# Altium PCB P2_tester.PcbDoc
Units mil, origin at the board's own origin, x right, y up, seen from the top; angles counter-clockwise.
Board outline 1210 x 3700 mil, 2 copper layers (Top Layer, Bottom Layer); 19 components, 40 nets, 201 pads, 0 vias.
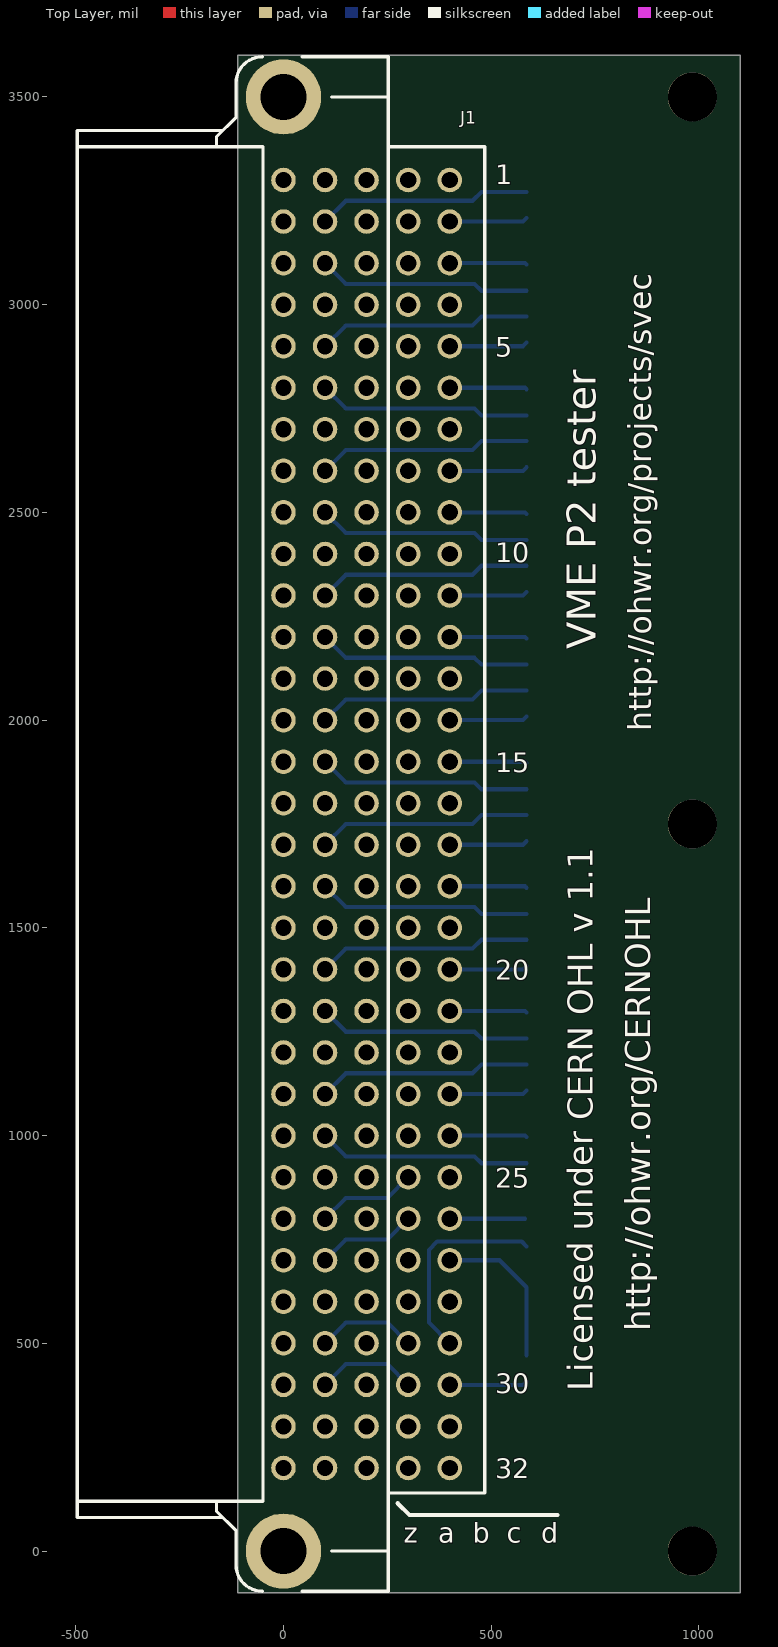
[diagram p0: Top Layer view]
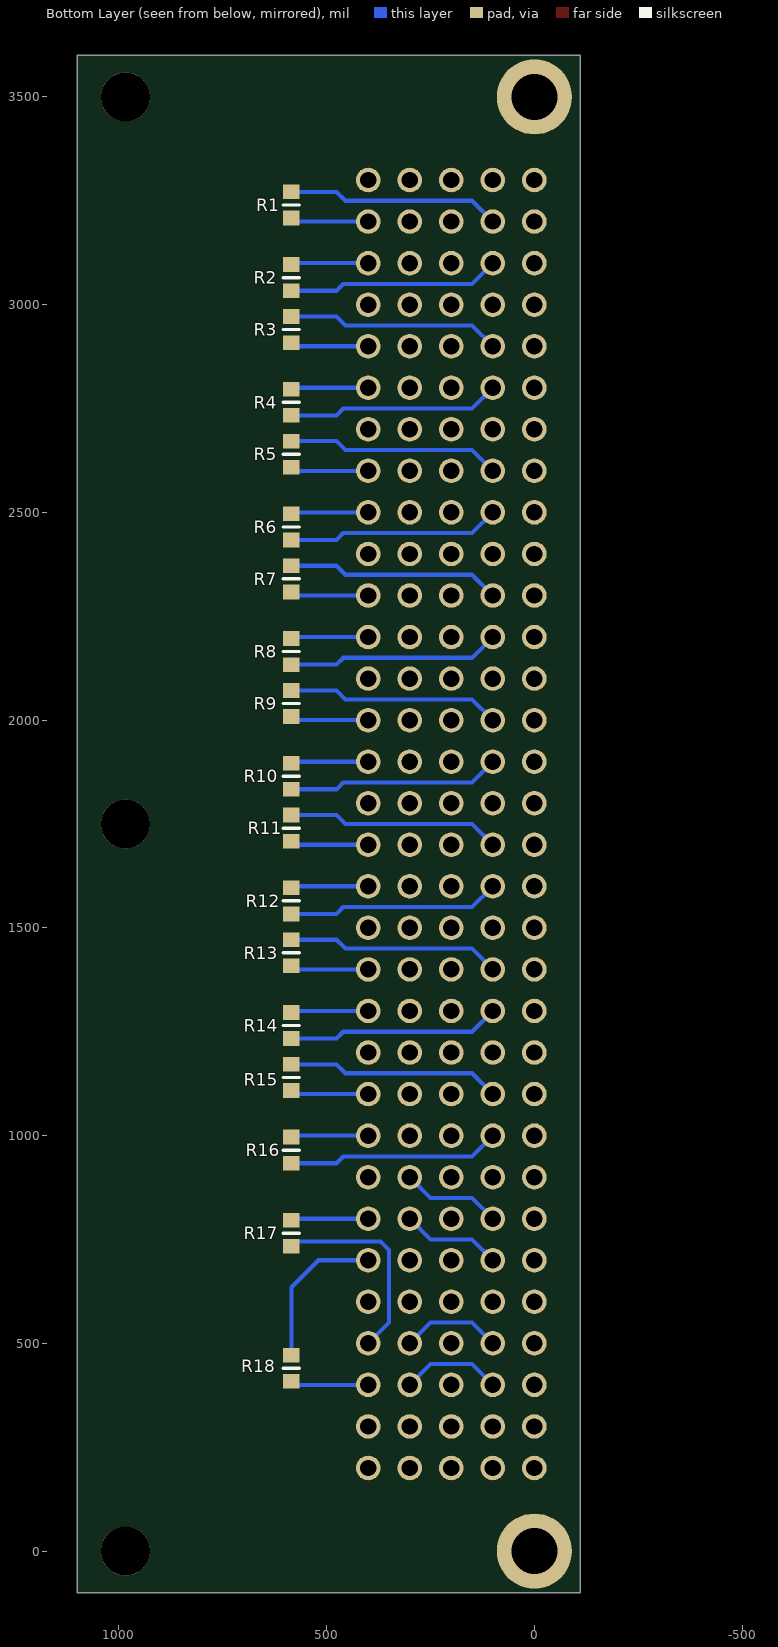
[diagram p1: Bottom Layer view, seen from below]
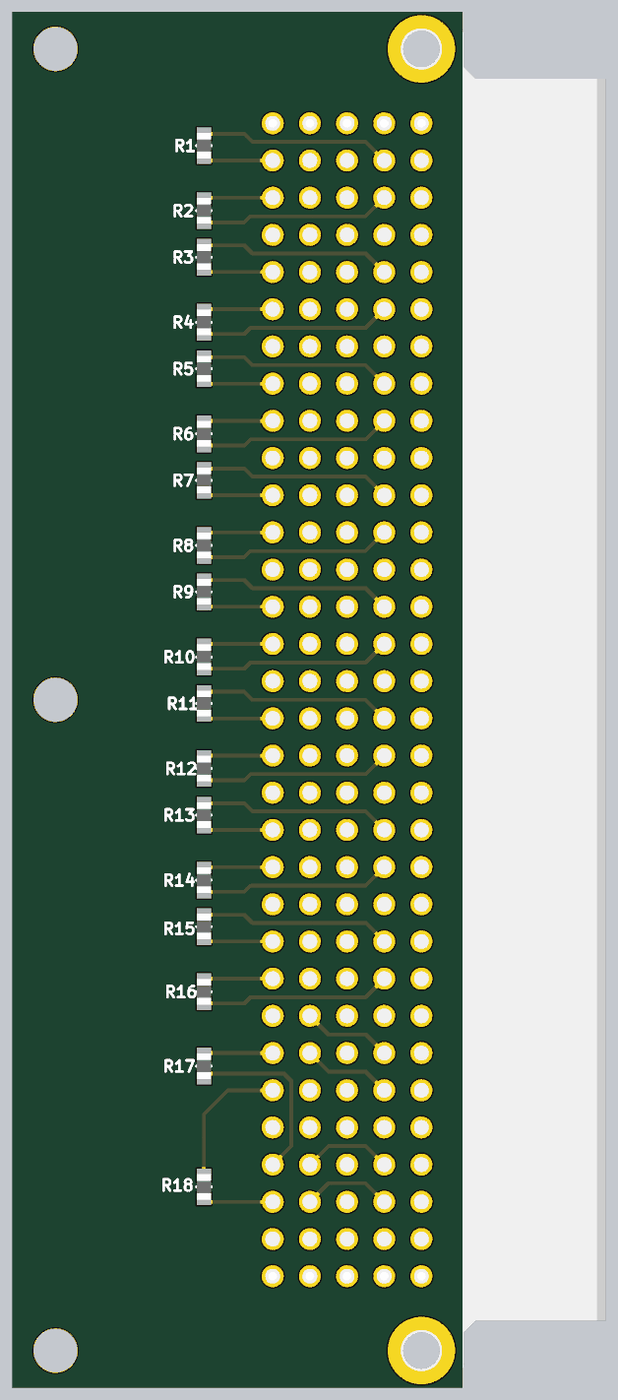
[diagram p2: 3D render of the assembled board from below, using the file's embedded part models]

## Layer stack, top to bottom
Top Layer: signal copper 1.4
Dielectric: dielectric 12.6, FR-4, Dk 4.8
Bottom Layer: signal copper 1.4

## Board outline
-110,-100 1100,-100 1100,3600 -110,3600

## Design rules (kind name [scope] priority, off if disabled: settings)
Clearance [All] p1: gap=5
DiffPairsRouting [All] p1: maxlimit=10 minlimit=6 mostfreqgap=6 maxuncoupledlength=500
HoleSize [All] p1: absolutevalues=TRUE maxlimit=1000 minlimit=1 maxpercent=80.000 minpercent=20.000
PolygonConnect [All] p1: connectstyle=Relief reliefconductorwidth=10 reliefentries=4 polygonreliefangle="90 Angle"
RoomDefinition P2_tester [InComponentClass('P2_tester')] p1: confinementstyle=ConfineIn formatcopy=TRUE lockcomponents=FALSE outline -780,-385 1490,-385 1490,3860 -780,3860
RoutingVias [All] p1: holewidth=28 width=50 viastyle="Through Hole" minholewidth=28 minwidth=50 maxholewidth=28 maxwidth=50
SilkToSilkClearance [All] p1: silktosilkclearance=0
SilkscreenOverComponentPads [All] p1: minsilkscreentomaskgap=5
SolderMaskExpansion [All] p1: expansion=4
Width [All] p1: maxlimit=10 minlimit=6 preferedwidth=10 minimp=50.000000 maximp=50.000000 favimp=50.000000
24 further rules are at their usual default settings.

## Components (designator, comment, footprint, x,y, rotation, side; value= is the part's Value field where it differs from the comment)
J1 "HAR-BUS 64" "HARTING_02 04 160 1101" 0,200 r180 top locked
R1 "100" RESC1608X55N 585,3240 r270 bottom
R2 "100" RESC1608X55N 585,3065 r90 bottom
R3 "100" RESC1608X55N 585,2940 r270 bottom
R4 "100" RESC1608X55N 585,2765 r90 bottom
R5 "100" RESC1608X55N 585,2640 r270 bottom
R6 "100" RESC1608X55N 585,2465 r90 bottom
R7 "100" RESC1608X55N 585,2340 r270 bottom
R8 "100" RESC1608X55N 585,2165 r90 bottom
R9 "100" RESC1608X55N 585,2040 r270 bottom
R10 "100" RESC1608X55N 585,1865 r90 bottom
R11 "100" RESC1608X55N 585,1740 r270 bottom
R12 "100" RESC1608X55N 585,1565 r90 bottom
R13 "100" RESC1608X55N 585,1440 r270 bottom
R14 "100" RESC1608X55N 585,1265 r90 bottom
R15 "100" RESC1608X55N 585,1140 r270 bottom
R16 "100" RESC1608X55N 585,965 r90 bottom
R17 "100" RESC1608X55N 585,765 r270 bottom
R18 "100" RESC1608X55N 585,440 r270 bottom

## Footprints (in the part's own frame and the unit in brackets; to place one, negate y for a bottom-side part, rotate by r counter-clockwise, add the part's x,y. Pads: shape width x height; smd on the part's side, far side on the other; paste and mask are expansions set on the pad)
"HARTING_02 04 160 1101" [mm] "PCB connector, DIN 41612, har-bus 64, 160 poles, Angled solder pins, 3.0 mm, Male contacts, Four first mating contacts, Performance level 2 as per IEC 60603-2, Row pitch: 2.54 mm, Without fixing"
  round 1.5 hole 1: a1(-2.54,-78.74) a2(-2.54,-76.2) a3(-2.54,-73.66) a4(-2.54,-71.12) a5(-2.54,-68.58) a6(-2.54,-66.04) a7(-2.54,-63.5) a8(-2.54,-60.96) a9(-2.54,-58.42) a10(-2.54,-55.88) a11(-2.54,-53.34) a12(-2.54,-50.8) a13(-2.54,-48.26) a14(-2.54,-45.72) a15(-2.54,-43.18) a16(-2.54,-40.64) a17(-2.54,-38.1) a18(-2.54,-35.56) a19(-2.54,-33.02) a20(-2.54,-30.48) a21(-2.54,-27.94) a22(-2.54,-25.4) a23(-2.54,-22.86) a24(-2.54,-20.32) a25(-2.54,-17.78) a26(-2.54,-15.24) a27(-2.54,-12.7) a28(-2.54,-10.16) a29(-2.54,-7.62) a30(-2.54,-5.08) a31(-2.54,-2.54) a32(-2.54,0) b1(-5.08,-78.74) b2(-5.08,-76.2) b3(-5.08,-73.66) b4(-5.08,-71.12) b5(-5.08,-68.58) b6(-5.08,-66.04) b7(-5.08,-63.5) b8(-5.08,-60.96) b9(-5.08,-58.42) b10(-5.08,-55.88) b11(-5.08,-53.34) b12(-5.08,-50.8) b13(-5.08,-48.26) b14(-5.08,-45.72) b15(-5.08,-43.18) b16(-5.08,-40.64) b17(-5.08,-38.1) b18(-5.08,-35.56) b19(-5.08,-33.02) b20(-5.08,-30.48) b21(-5.08,-27.94) b22(-5.08,-25.4) b23(-5.08,-22.86) b24(-5.08,-20.32) b25(-5.08,-17.78) b26(-5.08,-15.24) b27(-5.08,-12.7) b28(-5.08,-10.16) b29(-5.08,-7.62) b30(-5.08,-5.08) b31(-5.08,-2.54) b32(-5.08,0) c1(-7.62,-78.74) c2(-7.62,-76.2) c3(-7.62,-73.66) c4(-7.62,-71.12) c5(-7.62,-68.58) c6(-7.62,-66.04) c7(-7.62,-63.5) c8(-7.62,-60.96) c9(-7.62,-58.42) c10(-7.62,-55.88) c11(-7.62,-53.34) c12(-7.62,-50.8) c13(-7.62,-48.26) c14(-7.62,-45.72) c15(-7.62,-43.18) c16(-7.62,-40.64) c17(-7.62,-38.1) c18(-7.62,-35.56) c19(-7.62,-33.02) c20(-7.62,-30.48) c21(-7.62,-27.94) c22(-7.62,-25.4) c23(-7.62,-22.86) c24(-7.62,-20.32) c25(-7.62,-17.78) c26(-7.62,-15.24) c27(-7.62,-12.7) c28(-7.62,-10.16) c29(-7.62,-7.62) c30(-7.62,-5.08) c31(-7.62,-2.54) c32(-7.62,0) d1(-10.16,-78.74) d2(-10.16,-76.2) d3(-10.16,-73.66) d4(-10.16,-71.12) d5(-10.16,-68.58) d6(-10.16,-66.04) d7(-10.16,-63.5) d8(-10.16,-60.96) d9(-10.16,-58.42) d10(-10.16,-55.88) d11(-10.16,-53.34) d12(-10.16,-50.8) d13(-10.16,-48.26) d14(-10.16,-45.72) d15(-10.16,-43.18) d16(-10.16,-40.64) d17(-10.16,-38.1) d18(-10.16,-35.56) d19(-10.16,-33.02) d20(-10.16,-30.48) d21(-10.16,-27.94) d22(-10.16,-25.4) d23(-10.16,-22.86) d24(-10.16,-20.32) d25(-10.16,-17.78) d26(-10.16,-15.24) d27(-10.16,-12.7) d28(-10.16,-10.16) d29(-10.16,-7.62) d30(-10.16,-5.08) d31(-10.16,-2.54) d32(-10.16,0) z1(0,-78.74) z2(0,-76.2) z3(0,-73.66) z4(0,-71.12) z5(0,-68.58) z6(0,-66.04) z7(0,-63.5) z8(0,-60.96) z9(0,-58.42) z10(0,-55.88) z11(0,-53.34) z12(0,-50.8) z13(0,-48.26) z14(0,-45.72) z15(0,-43.18) z16(0,-40.64) z17(0,-38.1) z18(0,-35.56) z19(0,-33.02) z20(0,-30.48) z21(0,-27.94) z22(0,-25.4) z23(0,-22.86) z24(0,-20.32) z25(0,-17.78) z26(0,-15.24) z27(0,-12.7) z28(0,-10.16) z29(0,-7.62) z30(0,-5.08) z31(0,-2.54) z32(0,0)
  round 4.6 hole 2.8: MTG1(0,5.08) MTG2(0,-83.82)
  silkscreen extent -12.3,-86.27 12.6,7.53, body extent -12.3,-86.27 12.6,7.53, height 10.65
RESC1608X55N [mm] "Chip Resistor, EIA 0603, Metric 1608, Body 1.6x0.8mm, IPC Medium Density"
  rect 0.9x1 smd: 1(-0.8,0) 2(0.8,0)
  silkscreen extent 0,-0.5 0,0.5, body extent -0.87,-0.47 0.88,0.48, height 0.55

## Part data
J1: library part "HARTING_02 04 160 1101", "Connector 160zabcd Female (5x32)"
R1 R2 R3 R4 R5 R6 R7 R8 R9 R10 R11 R12 R13 R14 R15 R16 R17 R18: library part R0603_100R_0.1%_0.063W_10PPM, "Resistor - 0.1%"

## Free pads (board coordinates)
  round 118.11 hole 118.11: ""(984.25,0) ""(984.25,1750) ""(984.25,3500)

## Nets (pads, with @x,y where several pads share a name; then routed paths per layer and width w, separated by ;. In a path a pad name is that pad's centre, name@x,y a point inside that pad or via, vN(x,y) a via of type N, cw(c..) or ccw(c..) an arc to the next point about the centre after c; other vN are vias at no path point)
P2_DATA_N0: J1.a3 R2.1 | length 512.5
  Bottom Layer w10: J1.a3 150,3050 460,3050 476.5,3033.5 R2.1
P2_DATA_N1: J1.a6 R4.1 | length 512.5
  Bottom Layer w10: J1.a6 150,2750 460,2750 476.5,2733.5 R4.1
P2_DATA_N2: J1.a9 R6.1 | length 512.5
  Bottom Layer w10: J1.a9 150,2450 460,2450 476.5,2433.5 R6.1
P2_DATA_N3: J1.a12 R8.1 | length 512.5
  Bottom Layer w10: J1.a12 150,2150 460,2150 476.5,2133.5 R8.1
P2_DATA_N4: J1.a15 R10.1 | length 512.5
  Bottom Layer w10: J1.a15 150,1850 460,1850 476.5,1833.5 R10.1
P2_DATA_N5: J1.a18 R12.1 | length 512.5
  Bottom Layer w10: J1.a18 150,1550 460,1550 476.5,1533.5 R12.1
P2_DATA_N6: J1.a21 R14.1 | length 512.5
  Bottom Layer w10: J1.a21 150,1250 460,1250 476.5,1233.5 R14.1
P2_DATA_N7: J1.a24 R16.1 | length 512.5
  Bottom Layer w10: J1.a24 150,950 460,950 476.5,933.5 R16.1
P2_DATA_N10: J1.d3 R2.2 | length 186.5
  Bottom Layer w10: J1.d3 581.5,3100 R2.2
P2_DATA_N11: J1.d6 R4.2 | length 186.5
  Bottom Layer w10: J1.d6 581.5,2800 R4.2
P2_DATA_N12: J1.d9 R6.2 | length 186.5
  Bottom Layer w10: J1.d9 581.5,2500 R6.2
P2_DATA_N13: J1.d12 R8.2 | length 186.5
  Bottom Layer w10: J1.d12 581.5,2200 R8.2
P2_DATA_N14: J1.d15 R10.2 | length 186.5
  Bottom Layer w10: J1.d15 581.5,1900 R10.2
P2_DATA_N15: J1.d18 R12.2 | length 186.5
  Bottom Layer w10: J1.d18 581.5,1600 R12.2
P2_DATA_N16: J1.d21 R14.2 | length 186.5
  Bottom Layer w10: J1.d21 581.5,1300 R14.2
P2_DATA_N17: J1.d24 R16.2 | length 186.5
  Bottom Layer w10: J1.d24 581.5,1000 R16.2
P2_DATA_N18: J1.d27 R18.1 | length 375.4
  Bottom Layer w10: J1.d27 520,700 585,635 R18.1
P2_DATA_N19: J1.d30 R18.2 | length 188.5
  Bottom Layer w10: J1.d30 576.5,400 R18.2
P2_DATA_P0: J1.a2 R1.1 | length 514.6
  Bottom Layer w10: J1.a2 150,3250 455,3250 476.5,3271.5 R1.1
P2_DATA_P1: J1.a5 R3.1 | length 514.6
  Bottom Layer w10: J1.a5 150,2950 455,2950 476.5,2971.5 R3.1
P2_DATA_P2: J1.a8 R5.1 | length 514.6
  Bottom Layer w10: J1.a8 150,2650 455,2650 476.5,2671.5 R5.1
P2_DATA_P3: J1.a11 R7.1 | length 514.6
  Bottom Layer w10: J1.a11 150,2350 455,2350 476.5,2371.5 R7.1
P2_DATA_P4: J1.a14 R9.1 | length 514.6
  Bottom Layer w10: J1.a14 150,2050 455,2050 476.5,2071.5 R9.1
P2_DATA_P5: J1.a17 R11.1 | length 514.6
  Bottom Layer w10: J1.a17 150,1750 455,1750 476.5,1771.5 R11.1
P2_DATA_P6: J1.a20 R13.1 | length 514.6
  Bottom Layer w10: J1.a20 150,1450 455,1450 476.5,1471.5 R13.1
P2_DATA_P7: J1.a23 R15.1 | length 514.6
  Bottom Layer w10: J1.a23 150,1150 455,1150 476.5,1171.5 R15.1
P2_DATA_P10: J1.d2 R1.2 | length 188.5
  Bottom Layer w10: J1.d2 576.5,3200 R1.2
P2_DATA_P11: J1.d5 R3.2 | length 188.5
  Bottom Layer w10: J1.d5 576.5,2900 R3.2
P2_DATA_P12: J1.d8 R5.2 | length 188.5
  Bottom Layer w10: J1.d8 576.5,2600 R5.2
P2_DATA_P13: J1.d11 R7.2 | length 188.5
  Bottom Layer w10: J1.d11 576.5,2300 R7.2
P2_DATA_P14: J1.d14 R9.2 | length 188.5
  Bottom Layer w10: J1.d14 576.5,2000 R9.2
P2_DATA_P15: J1.d17 R11.2 | length 188.5
  Bottom Layer w10: J1.d17 576.5,1700 R11.2
P2_DATA_P16: J1.d20 R13.2 | length 188.5
  Bottom Layer w10: J1.d20 576.5,1400 R13.2
P2_DATA_P17: J1.d23 R15.2 | length 188.5
  Bottom Layer w10: J1.d23 576.5,1100 R15.2
P2_DATA_P18: J1.d26 R17.1 | length 181.5
  Bottom Layer w10: J1.d26 R17.1@581.5,800
P2_DATA_P19: J1.d29 R17.2 | length 493.8
  Bottom Layer w10: J1.d29 350,550 350,725 370,745 573.5,745 R17.2
P2_PLLFMC1_CLK_N: J1.a27 J1.c26 | length 241.4
  Bottom Layer w10: J1.a27 150,750 250,750 J1.c26
P2_PLLFMC1_CLK_P: J1.a26 J1.c25 | length 241.4
  Bottom Layer w10: J1.a26 150,850 250,850 J1.c25
P2_PLLFMC2_CLK_N: J1.a30 J1.c30 | length 241.4
  Bottom Layer w10: J1.a30 150,450 250,450 J1.c30
P2_PLLFMC2_CLK_P: J1.a29 J1.c29 | length 241.4
  Bottom Layer w10: J1.a29 150,550 250,550 J1.c29
pads on no net: J1.a1 J1.a4 J1.a7 J1.a10 J1.a13 J1.a16 J1.a19 J1.a22 J1.a25 J1.a28 J1.a31 J1.a32 J1.b1 J1.b2 J1.b3 J1.b4 J1.b5 J1.b6 J1.b7 J1.b8 J1.b9 J1.b10 J1.b11 J1.b12 J1.b13 J1.b14 J1.b15 J1.b16 J1.b17 J1.b18 J1.b19 J1.b20 J1.b21 J1.b22 J1.b23 J1.b24 J1.b25 J1.b26 J1.b27 J1.b28 J1.b29 J1.b30 J1.b31 J1.b32 J1.c1 J1.c2 J1.c3 J1.c4 J1.c5 J1.c6 J1.c7 J1.c8 J1.c9 J1.c10 J1.c11 J1.c12 J1.c13 J1.c14 J1.c15 J1.c16 J1.c17 J1.c18 J1.c19 J1.c20 J1.c21 J1.c22 J1.c23 J1.c24 J1.c27 J1.c28 J1.c31 J1.c32 J1.d1 J1.d4 J1.d7 J1.d10 J1.d13 J1.d16 J1.d19 J1.d22 J1.d25 J1.d28 J1.d31 J1.d32 J1.MTG1 J1.MTG2 J1.z1 J1.z2 J1.z3 J1.z4 J1.z5 J1.z6 J1.z7 J1.z8 J1.z9 J1.z10 J1.z11 J1.z12 J1.z13 J1.z14 J1.z15 J1.z16 J1.z17 J1.z18 J1.z19 J1.z20 J1.z21 J1.z22 J1.z23 J1.z24 J1.z25 J1.z26 J1.z27 J1.z28 J1.z29 J1.z30 J1.z31 J1.z32

## Silkscreen, mask and mechanical layers (free items; w line width, h text height)
Top Overlay:
  lines w10: 275,115 303,87 659.36,87
  text "VME P2 tester" at 752.01,2170 h70 r90
  text "http://ohwr.org/projects/svec" at 885,1973.33 h55 r90
  text "http://ohwr.org/CERNOHL" at 883.33,529.08 h60 r90
  text "Licensed under CERN OHL v 1.1" at 744.87,385.11 h60 r90
Mechanical 1:
  the board outline again, w10

## Text inside footprints (layer, text, board x,y; h text height)
J1: Top Overlay "1" at 510,3290 h47.24; Top Overlay "32" at 510,175 h47.24; Top Overlay "5" at 510,2875 h47.24; Top Overlay "10" at 510,2380 h47.24; Top Overlay "15" at 510,1875 h47.24; Top Overlay "20" at 510,1375 h47.24; Top Overlay "25" at 510,875 h47.24; Top Overlay "30" at 510,380 h47.24; Top Overlay "c" at 537.5,20 h47.24; Top Overlay "b" at 455,20 h47.24; Top Overlay "a" at 372.5,20 h47.24; Top Overlay "z" at 290,20 h47.24; Top Overlay "d" at 620,20 h47.24; Mechanical 14 "1" at 531.5,3322.64 h47.24 r180; Mechanical 14 "32" at 591.73,224.21 h47.24 r180; Mechanical 14 "5" at 549.41,2924.21 h47.24 r180; Mechanical 14 "10" at 583.66,2424.61 h47.24 r180; Mechanical 14 "15" at 583.66,1924.61 h47.24 r180; Mechanical 14 "20" at 590.75,1425 h47.24 r180; Mechanical 14 "25" at 592.72,924.02 h47.24 r180; Mechanical 14 "30" at 590.75,424.02 h47.24 r180; Mechanical 1 "d" at 425,110.95 h47.24 r180; Mechanical 1 "z" at 13.78,148.16 h47.24 r180; Mechanical 1 "a" at 115,148.16 h47.24 r180; Mechanical 1 "b" at 215,148.16 h47.24 r180; Mechanical 1 "c" at 320,110.95 h47.24 r180; Mechanical 8 "PCB" at -100,1825 h59.06 r270